# Altium PCB PC110.PcbDoc (part 9 of 24)
Units mm, origin at the board's own origin, x right, y up, seen from the top; angles counter-clockwise.
Board outline 150.05 x 107.35 mm, 10 copper layers (In2.Cu, F.Cu, B.Cu, In1.Cu, In3.Cu, In4.Cu, In5.Cu, In6.Cu, In7.Cu, In8.Cu); 936 components, 1434 nets, 4891 pads, 6088 vias.
Unrouted connection lines stored in the file: 2995.
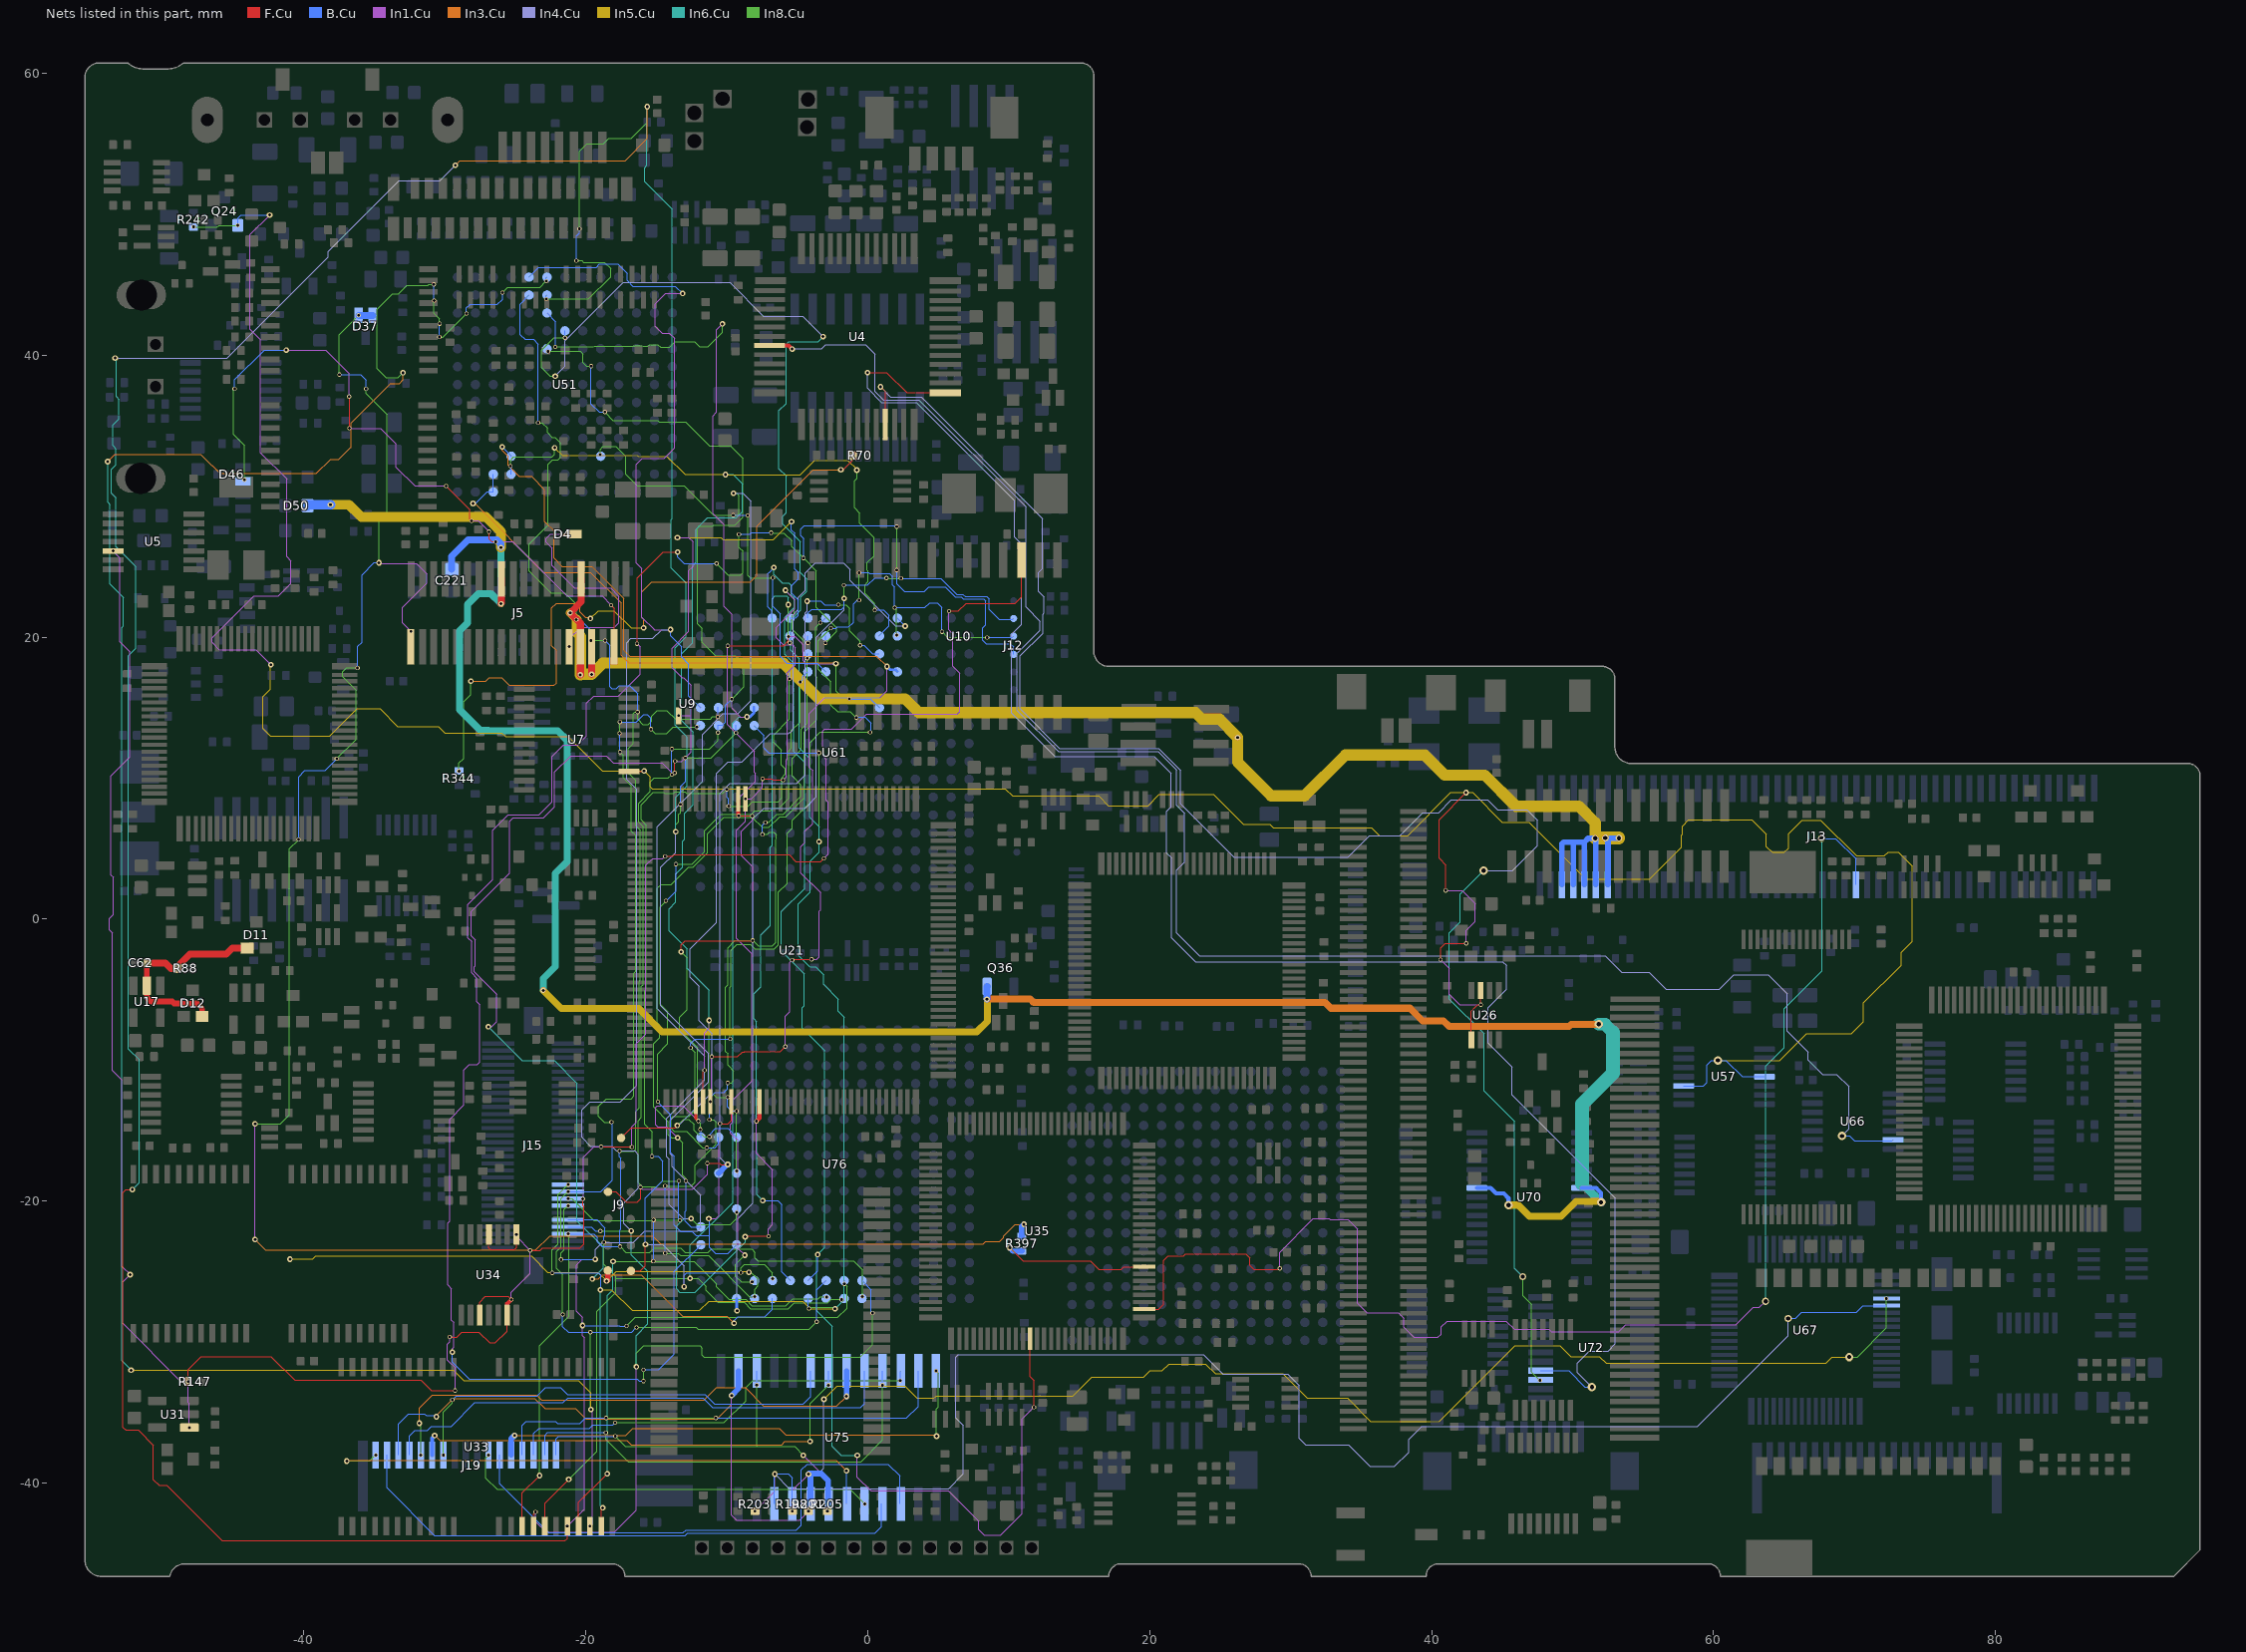
[diagram p16: the nets of this part, all layers, seen from the top]

## Via types
v1: diameter 0.3, hole 0.2, B.Cu to In8.Cu, tented both sides, 1934 vias
v2: diameter 0.4, hole 0.2, F.Cu to B.Cu, tented both sides, 1902 vias
v3: diameter 0.3, hole 0.2, F.Cu to In1.Cu, tented both sides, 1729 vias
v4: diameter 0.6, hole 0.3, F.Cu to B.Cu, tented both sides, 354 vias
v5: diameter 0.5, hole 0.3, F.Cu to B.Cu, tented both sides, 136 vias
v6: diameter 0.4, hole 0.2, B.Cu to In8.Cu, tented both sides, 12 vias
v7: diameter 0.3, hole 0.2, F.Cu to B.Cu, tented both sides, 6 vias
v8: diameter 0.6, hole 0.2, F.Cu to B.Cu, tented both sides, 4 vias
v9: diameter 0.5, hole 0.2, B.Cu to In8.Cu, tented both sides, 3 vias
v10: diameter 0.5, hole 0.2, F.Cu to B.Cu, tented both sides, 2 vias
v11: diameter 0.4, hole 0.3, F.Cu to B.Cu, tented both sides, 2 vias
v12: diameter 0.3, hole 0.2, F.Cu to In4.Cu, tented both sides, 2 vias
v13: diameter 0.6, hole 0.3, B.Cu to In8.Cu, tented both sides, 1 vias
v14: diameter 0.3, hole 0.2, F.Cu to In3.Cu, tented both sides, 1 vias

## Nets (pads, with @x,y where several pads share a name; then routed paths per layer and width w, separated by ;. In a path a pad name is that pad's centre, name@x,y a point inside that pad or via, vN(x,y) a via of type N, cw(c..) or ccw(c..) an arc to the next point about the centre after c; other vN are vias at no path point) (continued)
CPU_D25: J15.33 U33.36 U51.E2 U61.B6 U76.K16 | length 133.3
  F.Cu w0.08: U33.36@-24.505,-43.05 -24.505,-40.685 v2(-23.28,-39.46)
  In8.Cu w0.08: v1(-23.39,35.21) -23.11,35.21 -22.73,34.83 -22.73,34.52 -22.39,34.18 -22.19,34.18 -21.78,33.77 -21.78,32.77 -21.98,32.57 -22.36,32.57 -22.66,32.27 -22.66,27.95 -24.02,26.59 -24.02,24.68 -22.47,23.13 -21.48,23.13 -20.67,22.32 v1(-20.67,21.25) ; v2(-23.28,-39.46) -23.28,-30.26 -21.18,-28.16 -21.18,-22.39 v1(-21.25,-22.32) ; v1(-19.64,19.77) v1(-18.63,19.77) ; v1(-17.61,-16.45) -16.59,-16.45 -16.46,-16.32 -16.46,-13.64 -16.22,-13.4 -16.22,-4.43 -16.13,-4.34 -16.13,6.32 -16.44,6.63 -16.44,9.86 -16.97,10.39 -16.97,12.12 -16.64,12.45 -16.64,14.59 -16.54,14.69 v1(-16.32,14.69) -16.32,14.18 -15.95,13.81 -15.56,13.81 -15.32,14.05 -15.32,14.41 -14.92,14.81 -14.25,14.81 -13.64,14.2 -11.16,14.2 -11,14.36 v1(-10.64,14.36) ; v1(-17.56,-23.22) -17.15,-23.63 -15.46,-23.63 -15.15,-23.32 -13.28,-23.32 -12.95,-23.65 -11.34,-23.65 -11.09,-23.4 -8.23,-23.4 -8,-23.63 -8,-24.04 -7.81,-24.23 -1.02,-24.23 -0.38,-24.87 v1(-0.38,-26.77)
  B.Cu w0.08: U51.E2@-24.02,44.27 -24.67,43.62 -24.67,41.47 -24.32,41.12 -23.71,41.12 -23.39,40.8 v1(-23.39,35.21) ; v1(-21.25,-22.32) -19.42,-22.32 -19.17,-22.57 -19.17,-22.91 -18.86,-23.22 v1(-17.56,-23.22) -17.59,-23.19 -17.59,-22.07 -17.5,-21.98 -17.5,-16.96 -17.61,-16.85 v1(-17.61,-16.45) ; v1(-20.67,21.25) -20.41,21.25 -19.64,20.48 v1(-19.64,19.77) ; v1(-18.63,19.77) -18.29,19.43 -18.29,16.48 -18.16,16.35 -17.82,16.35 -17.62,16.55 -16.88,16.55 -16.32,15.99 v1(-16.32,14.69) ; v1(-10.64,14.36) -10.615,14.385 U61.B6@-10.615,15.03 ; U76.K16@-0.41,-26.9 -0.38,-26.87 v1(-0.38,-26.77)
CPU_D26: J15.34 U33.37 U51.E1 U61.A6 U76.K15 | length 160
  F.Cu w0.08: U33.37@-23.705,-43.05 -23.705,-42.185 v3(-23.56,-42.04)
  In1.Cu w0.08: v3(-23.56,-42.04) -23.56,-42.72 -22.8,-43.48 -17.96,-43.48 -16.41,-41.93 v2(-16.41,-31.74) ; v2(-13.99,20.54) -15.16,20.54 -15.16,20.56 -16.02,21.42 -16.02,24.87 -16.42,25.27 -16.42,32.26 -15.98,32.7 -14.45,32.7 -13.71,33.44 -13.71,41.19 -14.08,41.56 -14.57,41.56 -15.06,42.05 -15.06,43.64 -14.32,44.38 v2(-13.13,44.38)
  In4.Cu w0.08: v2(-16.77,-22.11) -17.31,-21.57 -17.31,-20.13 -16.27,-19.09 -16.27,-16.69 -16.54,-16.42 -17.83,-16.42 -18.15,-16.1 -19.67,-16.1 -20.29,-15.48 -20.29,-13.52 -19.72,-12.95 -17.54,-12.95 -16.4,-11.81 -16.4,9.2 -17.1,9.9 -17.1,19.61 -16.8,19.91 -15.24,19.91 -14.61,20.54 v2(-13.99,20.54)
  In6.Cu w0.08: v2(-16.77,-22.11) -16.77,-23.81 -15.59,-24.99 -15.59,-28.71 -16.41,-29.53 v2(-16.41,-31.74)
  In8.Cu w0.08: v1(-18.96,-22.12) -18.95,-22.11 v2(-16.77,-22.11) ; v2(-16.41,-31.74) -16.41,-30.77 -15.9,-30.26 -11.89,-30.26 -11.74,-30.41 -11.74,-30.91 -11.6,-31.05 -0.53,-31.05 0.34,-30.18 v1(0.34,-27.94)
  B.Cu w0.08: U51.E1@-24.02,45.54 -23.34,46.22 -19.26,46.22 -19.02,46.46 -17.71,46.46 -17.07,45.82 -17.07,45.3 -16.67,44.9 -13.65,44.9 v2(-13.13,44.38) ; J15.34@-21.25,-21.82 -19.61,-21.82 -19.31,-22.12 v1(-18.96,-22.12) ; v2(-13.99,20.54) -13.99,20.11 -13.21,19.33 -13.21,18.61 -12.69,18.09 -12.69,15.81 -12.49,15.61 -12.48,15.61 U61.A6@-11.87,15 ; U76.K15@-0.41,-25.63 0.25,-26.29 0.25,-27.85 v1(0.34,-27.94)
CPU_D27: J15.35 U33.38 U51.F3 U61.D6 U76.J16 | length 132.3
  F.Cu w0.08: U33.38@-22.905,-43.05 -22.905,-41.425 v2(-21.21,-39.73)
  In1.Cu w0.08: v2(-10.31,42.22) -10.71,41.82 -10.71,35.98 -10.99,35.7 -10.99,28.76 -10.2,27.97 -10.2,22.18 -9.64,21.62 -9.64,14.97 -9.02,14.35 v2(-8.57,14.35)
  In6.Cu w0.08: v2(-12.6,-25.47) -12.6,-23.12 -9.575,-20.095 -9.575,13.435 -9.58,13.44 -9.58,13.9 -9.13,14.35 v2(-8.57,14.35)
  In8.Cu w0.08: v1(-22.16,40.59) -19.46,40.59 -19.4,40.65 -16.62,40.65 -16.58,40.69 -15.99,40.69 -15.94,40.64 -15.6,40.64 -15.48,40.76 -14.89,40.76 -14.7,40.57 -14.05,40.57 -13.66,40.96 -12.29,40.96 -11.94,40.61 -11.33,40.61 -10.31,41.63 v2(-10.31,42.22) ; v2(-21.21,-39.73) -21.2,-39.73 -19.22,-37.75 -19.22,-27.82 -17.88,-26.48 -17.88,-25.47 ; v1(-18.719,-22.919) -18.719,-24.501 -17.88,-25.34 -17.88,-25.47 ; v1(-1.85,-26.97) -2.6,-26.97 -2.83,-27.2 -5.2,-27.2 -5.62,-27.62 -8.31,-27.62 -8.74,-27.19 -10.62,-27.19 -11.47,-26.34 -11.47,-26.05 -12.05,-25.47 v2(-12.6,-25.47) -17.88,-25.47
  B.Cu w0.08: U51.F3@-22.75,43 -22.14,42.39 -22.14,40.61 v1(-22.16,40.59) ; J15.35@-21.25,-21.32 -19.22,-21.32 -18.63,-21.91 -18.63,-22.42 -18.719,-22.509 v1(-18.719,-22.919) ; v1(-1.85,-26.97) -1.75,-26.97 U76.J16@-1.68,-26.9
  B.Cu w0.2: v2(-8.57,14.35) -8.36,14.35 -8.075,14.635 U61.D6@-8.075,15.03
CPU_D28: J15.37 U33.40 U51.F2 U61.C7 U76.J15 | length 339.1
  F.Cu w0.08: v2(-52.17,-19.17) -52.61,-19.17 -52.82,-19.38 -52.82,-36.03 -52.61,-36.24 -51.74,-36.24 -50.67,-37.31 -50.67,-39.75 -50.27,-40.15 -49.71,-40.15 -45.79,-44.07 -21.46,-44.07 -21.305,-43.915 v3(-21.305,-43.05)
  In1.Cu w0.08: v3(-21.305,-43.05) -21.3,-43.05 -20.1,-41.85 -20.1,-29.68 -20.23,-29.55 v2(-20.23,-28.82) -20.23,-28.22 -20.65,-27.8 -20.65,-24.51 -20.26,-24.12 v2(-19.33,-24.12)
  In3.Cu w0.08: v2(-29.25,53.48) -28.92,53.81 -17.21,53.81 -15.64,55.38 v2(-15.64,57.63)
  In4.Cu w0.08: v2(-53.38,39.8) -45.45,39.8 -38.275,46.975 -38.275,47.355 -33.24,52.39 -30.34,52.39 v2(-29.25,53.48) ; v2(-19.33,-24.12) -19.33,-23.5 -19.32,-23.49 -19.32,-23.42 -18.83,-22.93 -16.64,-22.93 -15.81,-22.1 -12.08,-22.1 -11.85,-21.87 -11.85,-19.57 -13.86,-17.56 -13.86,-16.79 -14.02,-16.63 -14.02,-14.27 -11.3,-11.55 -11.3,-9.52 -14.67,-6.15 -14.67,3.68 -13.62,4.73 v2(-13.62,6.2)
  In6.Cu w0.08: v2(-53.38,39.8) -53.31,39.73 -53.31,37.06 -53.125,36.875 -53.125,35.475 -53.55,35.05 -53.55,33.59 -53.325,33.365 -53.325,32.225 -53.65,31.9 -53.65,30.2 -53.33,29.88 -53.33,26.42 -51.92,25.01 -51.92,19.2 -52.43,18.69 -52.43,-9.21 -51.675,-9.965 -51.675,-18.675 v2(-52.17,-19.17) ; v2(-15.64,57.63) -15.66,57.61 -15.66,53.47 -15.82,53.31 -15.82,52.31 -13.89,50.38 -13.89,28.42 -13.96,28.35 -13.96,24.92 -12.87,23.83 -12.87,20.03 -13.65,19.25 -13.65,13.76 -12.82,12.93 -12.82,9.45 -13.62,8.65 v2(-13.62,6.2)
  In8.Cu w0.08: v1(-22.81,43.99) -19.81,43.99 -18.24,45.56 -18.24,46.15 -18.68,46.59 -20.15,46.59 -20.27,46.71 v1(-20.66,46.71) ; v1(-21.76,-24.14) -21.76,-23.68 -21.53,-23.45 -21.53,-20.6 v1(-21.25,-20.32) ; v1(-20.45,48.96) -20.45,54.47 -19.93,54.99 -18.76,54.99 -18.37,55.38 -16.76,55.38 -15.64,56.5 v2(-15.64,57.63) ; v1(-17.11,-28.86) -16.49,-28.24 -2.13,-28.24 -1.48,-27.59 -1.48,-27.55 -1.47,-27.54 -1.47,-26.05 v1(-1.65,-25.87) ; v2(-13.62,6.2) -13.62,6.69 -13.41,6.9 -13.41,7.44 -13.29,7.56 v1(-13.29,8.15) ; v1(-12.93,11.44) -11.125,11.44 v1(-9.345,13.22)
  B.Cu w0.08: v1(-22.81,43.99) -22.81,44.21 U51.F2@-22.75,44.27 ; v1(-21.76,-24.14) -19.35,-24.14 v2(-19.33,-24.12) ; v1(-20.66,46.71) -20.66,48.44 -20.45,48.65 v1(-20.45,48.96) ; v2(-20.23,-28.82) -17.63,-28.82 -17.57,-28.88 -17.13,-28.88 v1(-17.11,-28.86) ; v1(-13.29,8.15) -13.29,9.43 -12.93,9.79 v1(-12.93,11.44) ; v1(-9.345,13.22) U61.C7@-9.345,13.76 ; U76.J15@-1.68,-25.63 -1.65,-25.66 v1(-1.65,-25.87)
CPU_D29: J15.38 U33.41 U51.F5 U61.B7 U76.H16 | length 135.5
  F.Cu w0.08: U33.41@-20.505,-43.05 -20.505,-41.365 -18.48,-39.34 v2(-18.48,-39.33)
  In6.Cu w0.08: v2(-18.48,-39.33) -18.48,-26.68 -18.08,-26.28 -18.08,-24.29 v2(-18.06,-24.27)
  In8.Cu w0.08: v1(-22.68,40.27) -20.39,40.27 -20.2,40.08 -20.2,39.46 -19.97,39.23 v1(-19.62,39.23) ; v1(-21.25,-19.82) -20.98,-19.82 -19.43,-21.37 -15.23,-21.37 v1(-15.19,-21.33) -15.17,-21.35 v1(-13.32,-21.35) ; v1(-18.65,35.97) -18.07,35.39 -14.91,35.39 -14.78,35.26 -12.91,35.26 -11.23,33.58 -9.72,33.58 -8.84,32.7 -8.84,28.516 -9.416,27.94 -10.93,27.94 -11.01,27.86 -11.96,27.86 -12.07,27.75 -12.07,20.96 -11.75,20.64 -11.75,19.63 -10.81,18.69 -9.4,18.69 -8.77,18.06 -8.77,16.48 v1(-9.64,15.61) ; v2(-18.06,-24.27) -15.22,-24.27 v1(-15.21,-24.26) -12.33,-24.26 -10.74,-25.85 -10.74,-26.07 -9.84,-26.97 -8.65,-26.97 -8.2,-27.42 -5.81,-27.42 -5.32,-26.93 -3.52,-26.93 -3.39,-26.8 v1(-2.91,-26.8) ; v1(-13.9,10.25) -14.14,10.01 -15.15,10.01 -15.43,9.73 -15.43,9.06 -16.26,8.23 -16.26,6.87 -15.94,6.55 -15.94,-4.66 -16.05,-4.77 -16.05,-14.07 -16.28,-14.3 -16.28,-18.69 -16.01,-18.96 -14.97,-18.96 -14.59,-18.58 -13.41,-18.58 v1(-13.4,-18.57) ; v1(-13.89,12.07) -11.21,12.07 -10.615,12.665 v1(-10.615,13.24)
  B.Cu w0.08: U51.F5@-22.75,40.46 -22.68,40.39 v1(-22.68,40.27) ; v1(-19.62,39.23) -19.62,36.54 -19.05,35.97 v1(-18.65,35.97) ; v1(-15.21,-24.26) -15.19,-24.24 v1(-15.19,-21.33) ; v1(-13.9,10.25) -13.9,12.06 v1(-13.89,12.07) ; v1(-13.4,-18.57) -13.4,-21.27 v1(-13.32,-21.35) ; v1(-10.615,13.24) -10.615,13.76 -10.3,13.76 -10.08,13.98 -10.08,15.17 v1(-9.64,15.61) ; U76.H16@-2.95,-26.9 -2.91,-26.86 v1(-2.91,-26.8)
CPU_D30: J15.39 U33.42 U51.F1 U61.A7 U76.H15 | length 243.1
  In1.Cu w0.08: v3@-19.68,-43.05 -19.53,-42.9 -19.53,-34.89 v2(-19.64,-34.78)
  In3.Cu w0.08: v2(-53.91,32.46) -53.41,32.96 -47.31,32.96 -46.53,32.18 -46.49,32.18 -45.93,31.62 -39.11,31.62 -38.1,32.63 -37.51,32.63 -36.69,33.45 -36.66,33.45 -36.66,35.18 -33.84,38 -33.23,38 -32.97,38.26 v2(-32.97,38.76)
  In5.Cu w0.08: v2(-52.25,-31.99) -29.41,-31.99 -28.66,-32.74 -20.51,-32.74 -19.64,-33.61 v2(-19.64,-34.78)
  In6.Cu w0.08: v2(-53.91,32.46) -53.91,29.57 -53.74,29.4 -53.74,23.77 -52.8,22.83 -52.8,20.8 -52.79,20.79 -52.915,20.665 -52.915,-31.325 v2(-52.25,-31.99)
  In8.Cu w0.08: v2(-32.97,38.76) -33.32,38.41 -34.17,38.41 -34.8,39.04 -34.8,43.26 -33.71,44.35 -33.28,44.35 -32.67,44.96 -31.19,44.96 -31.12,45.03 v1(-30.78,45.03) ; v1(-30.76,43.88) -30.76,42.96 -30.37,42.57 v1(-30.37,42.24) ; v1(-30.38,41.29) -30.12,41.29 v1(-28.46,42.95) ; v1(-25.91,44.45) -25.55,44.81 -23.26,44.81 v1(-22.81,45.26) ; v1(-21.64,-28.03) -21.64,-25.21 -22.08,-24.77 -22.08,-23.56 -21.76,-23.24 -21.76,-19.83 v1(-21.25,-19.32) ; v1(-19.67,-29.29) -19.66,-29.3 -19.66,-34.76 v2(-19.64,-34.78) ; v1(-18.18,-14.4) -18.69,-14.4 -19.1,-13.99 -19.1,-13.28 -18.55,-12.73 -16.79,-12.73 -16.59,-12.53 -16.59,-3.83 -16.47,-3.71 -16.47,5.94 -16.78,6.25 -16.78,9.47 -17.33,10.02 -17.33,11.62 v1(-17.57,11.86) ; v1(-17.61,13.19) -17.59,13.21 v1(-17.59,13.99) ; v1(-16.41,-28.95) -16.4,-28.94 -12.17,-28.94 -12.03,-29.08 -4.15,-29.08 v1(-3.62,-28.55) ; v1(-15.38,13.48) -15.07,13.17 -14.26,13.17 -13.8,13.63 v1(-12.12,13.63)
  B.Cu w0.08: v1(-30.78,45.03) -30.76,45.01 v1(-30.76,43.88) ; v1(-30.38,41.29) -30.37,41.3 v1(-30.37,42.24) ; v1(-28.46,42.95) -28.46,43.36 -28.2,43.62 -26.27,43.62 -25.91,43.98 v1(-25.91,44.45) ; v1(-22.81,45.26) -22.81,45.48 U51.F1@-22.75,45.54 ; v1(-21.64,-28.03) -21.64,-28.89 -21.24,-29.29 v1(-19.67,-29.29) -16.75,-29.29 v1(-16.41,-28.95) ; v1(-21.25,-19.32) -18.93,-19.32 -18.12,-18.51 -18.12,-14.46 v1(-18.18,-14.4) ; v1(-17.61,13.19) -17.57,13.15 v1(-17.57,11.86) ; v1(-17.59,13.99) -16.435,13.99 -15.9,14.525 -15.625,14.525 -15.38,14.28 v1(-15.38,13.48) ; v1(-12.12,13.63) -12.015,13.63 U61.A7@-11.885,13.76 ; v1(-3.62,-28.55) -3.62,-26.3 U76.H15@-2.95,-25.63
  other v3: -19.705,-43.05
CPU_D31: J15.40 U33.43 U51.G4 U61.D7 U76.G16 | length 166.5
  F.Cu w0.08: U33.43@-18.905,-43.05 -18.905,-41.855 v2(-18.8,-41.75)
  In4.Cu w0.08: v2(-22.17,38.51) -21.47,39.21 -21.47,41.03 -17.35,45.15 -9.78,45.15 -7.39,42.76 -4.61,42.76 v2(-3.17,41.32)
  In5.Cu w0.08: v2(-18.96,-26.29) -18.17,-26.29 -16.71,-27.75 -11.92,-27.75 -11.26,-27.09 -4.61,-27.09 -4.07,-27.63 v2(-2.32,-27.63)
  In6.Cu w0.08: v2(-18.96,-26.29) -18.96,-41.59 v2(-18.8,-41.75) ; v2(-3.17,41.32) -3.52,40.97 -5.61,40.97 -5.79,40.79 -5.79,36.59 -6.31,36.07 -6.31,31.96 -5.79,31.44 -5.79,28.83 -6.02,28.6 -6.02,28.01 -4.79,26.78 -4.79,24.59 -4.33,24.13 -4.33,23.25 -4.74,22.84 -4.74,21.92 -5.45,21.21 -5.45,19.08 -4.86,18.49 -4.86,12.15 -4.11,11.4 -4.11,7.22 -3.45,6.56 v2(-3.45,5.5) -3.45,4.74 -4.08,4.11 -4.08,1.91 -4.92,1.07 -4.92,-2.58 -4.12,-3.38 -3.69,-3.38 -3.13,-3.94 -3.13,-4.63 -2.1,-5.66 -2.1,-6.53 -1.67,-6.96 -1.67,-26.98 v2(-2.32,-27.63)
  In8.Cu w0.08: v1(-22.38,-25.09) -22.38,-23.45 -21.98,-23.05 -21.98,-19.55 v1(-21.25,-18.82) ; v2(-22.17,38.51) -22.53,38.51 -23.13,39.11 -23.13,40.37 -22.26,41.24 v1(-21.48,41.24) ; v1(-4.17,-27.61) -4.1,-27.54 -2.32,-27.54 v2(-2.32,-27.63) ; v2(-3.45,5.5) v1(-3.45,11.79)
  B.Cu w0.08: v1(-22.38,-25.09) -19.09,-25.09 -18.92,-25.26 -18.92,-26.25 v2(-18.96,-26.29) ; v1(-21.48,41.24) U51.G4@-21.48,41.73 ; U61.D7@-8.06,13.73 -7.37,13.04 -7.37,12.14 -7.02,11.79 v1(-3.45,11.79) ; U76.G16@-4.22,-26.9 -4.22,-27.56 v1(-4.17,-27.61)
CPU_DC#: U21.41 U61.H1 U76.A12 | length 62.5
  F.Cu w0.2: U21.41@-12.19,-12.94 -12.19,-14.14 v3(-12.02,-14.31)
  In1.Cu w0.08: v2(-13.49,-15.51) -14.26,-14.74 -14.91,-14.74 -15.05,-14.6 -15.05,-13.36 -14.93,-13.24 -13.09,-13.24 v3(-12.02,-14.31)
  In8.Cu w0.08: v1(-12.9,-18.57) -12.9,-18.4 -13.13,-18.17 -13.13,-15.87 v2(-13.49,-15.51) -13.92,-15.51 -14.14,-15.29 -14.14,-14.36 -15.17,-13.33 -15.17,-8.81 -14.76,-8.4 -14.76,-7.5 -14.93,-7.33 -14.93,2.2 -14.66,2.47 -13.93,2.47 -12.71,3.69 -12.39,3.69 -11.37,4.71 -11.37,6.05 -10.18,7.24 -8.21,7.24 -7.48,6.51 -7,6.51 -6.24,7.27 -5.82,7.27 -4.49,8.6 -4.49,13.28 -3.61,14.16 -3.61,17.14 -3.7,17.23 -3.7,20.69 v1(-3.35,21.04)
  B.Cu w0.08: v1(-12.9,-18.57) -12.9,-20.66 -12.96,-20.72 -12.96,-21.4 -12.54,-21.82 U76.A12@-11.84,-21.82 ; v1(-3.35,21.04) -3.335,21.04 U61.H1@-2.995,21.38
CPU_EADS#: J12.4 U61.H2 U76.A13 | length 143.1
  F.Cu w0.08: v3(-16.36,19.54) -16.36,24.19 -14.51,26.04 v2(-13.49,26.04)
  In1.Cu w0.08: v2(-29.47,-30.71) -29.47,-30.46 -29.36,-30.35 -29.36,-28.6 -29.53,-28.43 -29.53,-26.21 -29.8,-25.94 -29.8,-21.55 -29.66,-21.41 -29.66,-14.2 -28.64,-13.18 -28.64,-10.71 -28.25,-10.32 -27.71,-10.32 -27.52,-10.13 -27.52,-6.07 -27.73,-5.86 -27.73,-4.18 -28.1,-3.81 -28.1,-1.59 -28.37,-1.32 -28.37,1.03 -26.59,2.81 -26.59,6.31 -25.5,7.4 -23.31,7.4 -22.39,8.32 -22.39,11.54 -21.58,12.35 -20.57,12.35 -19.94,12.98 -19.94,15.32 -19.44,15.82 -17.69,15.82 -16.14,17.37 -16.14,19.32 v3(-16.36,19.54)
  In8.Cu w0.08: v1(-15.9,-32.76) v1(-15.9,-31.96) ; v1(-10.73,25.23) -9.91,24.41 -9.03,24.41 -8.87,24.57 -8.87,26.1 -9.14,26.37 v1(-9.14,27.3) ; v1(-6.85,27.41) -6.84,27.4 -5.94,27.4 -5.38,26.84 -5.38,26.44 v1(-4.55,25.61) -3.64,24.7 -3.64,22.11 -2.19,20.66 -2.19,20.405 v1(-2.995,19.6) ; v1(2.06,24.77) v1(2.06,27.84)
  B.Cu w0.08: v2(-29.47,-30.71) -29.47,-31.4 -28.27,-32.6 -16.35,-32.6 -16.19,-32.76 v1(-15.9,-32.76) ; v1(-15.9,-31.96) -14.83,-31.96 -13.73,-30.86 -13.73,-24.98 U76.A13@-11.84,-23.09 ; v2(-13.49,26.04) -13.49,25.69 -13.03,25.23 v1(-10.73,25.23) ; v1(-9.14,27.3) -8.37,27.3 -8.26,27.41 v1(-6.85,27.41) ; v1(-4.55,25.61) -4.55,26.98 -4.76,27.19 -4.76,27.67 -4.51,27.92 1.98,27.92 v1(2.06,27.84) ; v1(-2.995,19.6) U61.H2@-2.995,20.11 ; v1(2.06,24.77) 2.06,23.78 2.6,23.24 4.01,23.24 4.34,23.57 5.5,23.57 6.22,22.85 6.64,22.85 6.78,22.71 8.23,22.71 8.38,22.56 8.38,20.88 8.15,20.65 8.15,19.79 8.39,19.55 10.11,19.55 10.35,19.31 J12.4@10.35,18.78
CPU_FLUSH#: J12.2 U61.G1 U76.C16 | length 74.8
  In4.Cu w0.08: v2(-9.27,-27.77) -9.27,-21.29 -8.13,-20.15 -8.13,7.13 -7.38,7.88 -4.45,7.88 -3.64,8.69 -3.64,19.98 -1.67,21.95 v2(-1.67,22.75)
  In8.Cu w0.08: v1(-1.69,23.69) -1.67,23.67 v2(-1.67,22.75) ; v1(1.33,24.2) 1.35,24.18 v1(2.36,24.18)
  B.Cu w0.08: v2@-9.3,-27.74 v2(-9.27,-27.77) ; U61.G1@-4.265,21.38 -4.26,21.385 -4.26,21.72 -3.99,21.99 -1.84,21.99 -1.67,22.16 v2(-1.67,22.75) ; v1(-1.69,23.69) -0.01,23.69 0.5,24.2 v1(1.33,24.2) ; v1(2.36,24.18) 5.17,24.18 6.31,23.04 6.75,23.04 6.9,22.89 8.43,22.89 8.61,22.71 8.61,21.99 9.33,21.27 10.29,21.27 J12.2@10.35,21.33
  B.Cu w0.2: v2@-9.3,-27.74 U76.C16@-9.3,-26.9
CPU_HLDA: J9.4 U61.L3 U76.B9 | length 65.2
  F.Cu w0.08: J9.4@-18.42,-19.34 -17.86,-19.34 -17.14,-20.06 -16.35,-20.06 -16.11,-19.82 v3(-16.11,-19.01) ; v3(-11.38,-17.31) -10.5,-17.31 -10.41,-17.4 v2(-9.93,-17.4)
  In1.Cu w0.08: v3(-16.11,-19.01) -15.99,-19.13 -12.43,-19.13 -11.38,-18.08 v3(-11.38,-17.31)
  In4.Cu w0.08: v2(-9.93,-17.4) -9.99,-17.4 -10.48,-16.91 -10.48,8.94 -9.77,9.65 -5.02,9.65 -4.42,10.25 -4.42,21.74 -4.3,21.86 v2(-4.3,22.56)
  In8.Cu w0.08: v1(-2.08,22.3) -1.54,22.3 -1.3,22.06 -1.3,20.45 -0.55,19.7 v1(-0.55,19.425)
  B.Cu w0.08: v2(-4.3,22.56) -3.32,22.56 -3.06,22.3 v1(-2.08,22.3) ; v1(-0.55,19.425) -0.255,19.425 0.33,18.84 U61.L3@0.815,18.84
  B.Cu w0.4: U76.B9@-10.57,-18.01 -9.96,-17.4 v2(-9.93,-17.4)
CPU_HOLD: J9.1 U61.M1 U76.C7 | length 66.3
  F.Cu w0.08: J9.1@-17.495,-15.515 -16.77,-14.79 -13.67,-14.79 v2(-13.51,-14.63)
  In4.Cu w0.08: v2(-13.51,-14.63) -13.4,-14.63 -11.05,-12.28 -11.05,-8.12 -11.96,-7.21 -11.96,-4.74 -12.59,-4.11 -12.59,-2.1 -10.73,-0.24 -10.73,10.33 -9.9,11.16 -8.92,11.16 -6.91,13.17 -5.62,13.17 -5.56,13.23 -5.51,13.23 -5.29,13.45 -5.29,21.6 -4.92,21.97 -4.92,22.83 -4.43,23.32 -4.43,24.56 -3.72,25.27 -1.72,25.27 -1.25,24.8 -1.25,24.02 1.98,20.79 v2(2.65,20.79)
  In8.Cu w0.08: v2(-13.51,-14.63) -13.06,-14.18 -12.69,-14.18 -12.32,-14.55 -12.32,-14.97 -12.03,-15.26 -11.8,-15.26 -11.62,-15.44 v1(-11.23,-15.44)
  B.Cu w0.08: v1(-11.23,-15.44) -11.23,-15.3 -10.78,-14.85 -9.92,-14.85 U76.C7@-9.3,-15.47 ; U61.M1@2.085,21.38 2.085,21.375 2.65,20.81 v2(2.65,20.79)
CPU_INTR: U21.133 U61.G2 U76.D15 | length 61.8
  F.Cu w0.08: v3(-7.46,9.96) -6.8,9.96 -6.72,9.88 -6.01,9.88 v3(-6,9.87)
  In1.Cu w0.08: v2(-8.72,-23.83) -9.2,-23.35 -9.2,-15.69 -9.72,-15.17 -9.72,-14.56 -9.58,-14.42 -9.58,-12.85 -8.21,-11.48 -8.21,-2.46 -9.32,-1.35 -9.32,6.3 -8.68,6.94 v3(-8.68,8.535) -8.265,8.535 -7.46,9.34 v3(-7.46,9.96) ; v3(-6,9.87) -5.79,10.08 -5.79,11.26 -5.7,11.35 -5.7,17.47 -5.13,18.04 -5.13,19.26 -5.33,19.46 -6,19.46 -6.48,19.94 -6.48,20.7 -5.16,22.02 -5.16,22.64 -5.84,23.32 v2(-5.84,23.33)
  In8.Cu w0.08: v2(-8.72,-23.83) -9.37,-24.48 -9.37,-25.32 -8.97,-25.72 v1(-8.21,-25.72) ; v2(-5.84,23.33) -5.22,22.71 -5.22,21.67 -5.37,21.52 -5.37,20.57 -4.4,19.6 v1(-4.25,19.6)
  B.Cu w0.08: v1(-8.21,-25.72) -8.12,-25.72 U76.D15@-8.03,-25.63 ; U61.G2@-4.265,20.11 -4.265,19.615 v1(-4.25,19.6)
CPU_KEN#: J12.3 U61.M2 U76.B7 | length 78.2
  In8.Cu w0.08: v1(-12.57,-9.13) -12.24,-9.46 -12.24,-13.56 -12.68,-14 -13.83,-14 -13.95,-14.12 -13.95,-14.85 -13.74,-15.06 -12.85,-15.06 -11.7,-16.21 v1(-11.41,-16.21) ; v1(-9.76,-8.49) -9.76,-4.81 -9.71,-4.76 -9.71,-2.2 -9.28,-1.77 -8.33,-1.77 -7.99,-2.11 -6.64,-2.11 -6.34,-1.81 -6.34,1.91 -5.72,2.53 -5.72,6.09 -5.35,6.46 -5.35,7.01 -4.07,8.29 -4.07,12.55 -3.36,13.26 v1(0.16,13.26) ; v1(-2.62,20.64) -3.5,19.76 -3.5,17.72 -2.62,16.84 -2.62,15.2 -2.15,14.73 -1.24,14.73 v1(-0.81,14.3) ; v1(-0.61,22.62) v1(-0.61,24.57) ; v1(1.91,22.1) 2.05,21.96 v1(2.05,20.16) ; v1(5.28,20.39) 5.66,20.01 8.44,20.01 v1(8.47,19.98)
  B.Cu w0.08: v1(-12.57,-9.13) -12.57,-8.83 -12.23,-8.49 v1(-9.76,-8.49) ; v1(-11.41,-16.21) -10.84,-16.21 -10.57,-15.94 U76.B7@-10.57,-15.47 ; v1(-2.62,20.64) -2.24,20.64 -2.16,20.72 -1.34,20.72 -1,21.06 -1,22.36 -0.74,22.62 v1(-0.61,22.62) ; v1(-0.81,14.3) -0.76,14.35 -0.2,14.35 0.24,13.91 0.24,13.34 v1(0.16,13.26) ; v1(-0.61,24.57) -0.59,24.59 0.05,24.59 0.11,24.53 1.53,24.53 1.77,24.29 1.77,23.69 1.91,23.55 v1(1.91,22.1) 4.05,22.1 4.4,22.45 4.94,22.45 5.26,22.13 5.26,20.41 v1(5.28,20.39) ; v1(8.47,19.98) 10.25,19.98 J12.3@10.35,20.08
CPU_LDEV#: U21.43 U51.D11 U61.M4 | length 84
  F.Cu w0.08: v3(-11.07,-9.75) -9.24,-9.75 -8.9,-9.41 -8.75,-9.41 -8.735,-9.395 -6.205,-9.395 v3(-5.85,-9.04) ; v3(-5.36,-2.9) -5.31,-2.85 v3(-3.98,-2.85)
  In1.Cu w0.08: v3(-11.174,-12.94) -11.07,-12.836 v3(-11.07,-9.75) ; v3(-5.85,-9.04) -5.85,-6.88 -5.53,-6.56 -5.53,-3.07 v3(-5.36,-2.9) ; v3(-3.98,-2.85) -3.61,-2.85 -3.43,-2.67 -3.43,0.57 -3.35,0.65 -3.35,1.89 -4.74,3.28 -4.74,5.13 -4.46,5.41 -4.46,6.23 -3.92,6.77 -3.92,10.54 -4.16,10.78 -4.16,14.59 -3.04,15.71 0.87,15.71 1.36,16.2 v2(1.36,17.93)
  In3.Cu w0.08: v2(-25.93,33.5) -25.93,33.24 -25.51,32.82 -25.51,32.2 -24.73,31.42 -23.86,31.42 -22.91,30.47 -22.91,28.19 -22.27,27.55 -22.27,25.6 -21.67,25 -19.58,25 -17.32,22.74 -17.32,19.09 -16.89,18.66 0.63,18.66 v2(1.36,17.93)
  B.Cu w0.08: v2(-25.93,33.5) -25.29,32.86 U51.D11@-25.29,32.84
  B.Cu w0.2: v2(1.36,17.93) 1.6,17.69 1.965,17.69 U61.M4@2.085,17.57
CPU_MIO#: U21.50 U51.J11 U61.H4 U76.C11 | length 119.3
  F.Cu w0.08: v2(-8.69,-22.52) -8.65,-22.48 v3(-7.04,-22.48)
  F.Cu w0.3: v3(-7.9,-14.33) -7.68,-14.11 U21.50@-7.68,-12.94
  In1.Cu w0.08: v3(-7.9,-14.33) -7.9,-16.61 -6.75,-17.76 -6.75,-21.67 -7.04,-21.96 v3(-7.04,-22.48)
  In4.Cu w0.08: v2(-12.53,-21.23) -13.1,-21.23 -14.09,-20.24 -14.09,-17.02 -14.27,-16.84 -14.27,-14.12 -11.56,-11.41 -11.56,-9.72 -14.94,-6.34 -14.94,6.57 -11.72,9.79 -11.72,13.11 -10.25,14.58 -9.19,14.58 -8.28,15.49 -8.28,29.65 -8.84,30.21 v2(-9.53,30.21)
  In6.Cu w0.08: v2(-12.53,-21.23) -13.04,-21.23 -13.56,-21.75 -13.56,-26.23 -13.34,-26.45 -12.23,-26.45 -8.69,-22.91 v2(-8.69,-22.52)
  In8.Cu w0.08: v1(-18.98,32.96) -18.98,33.33 -18.79,33.52 -17.87,33.52 -17.17,32.82 -17.17,31.56 -16.34,30.73 -13.02,30.73 -10.94,28.65 v1(-9.54,28.65) -9.28,28.65 -9.12,28.81 -9.12,30.05 -9.28,30.21 v2(-9.53,30.21) ; v2(-12.53,-21.23) -12.09,-21.67 -9.74,-21.67 -9.3,-21.23 v1(-9.3,-20.8) ; v1(-8.51,28.63) -8.5,28.62 -8.5,24.39 -8.32,24.21 v1(-6.73,24.21)
  B.Cu w0.08: v1(-18.98,32.96) -18.98,32.88 U51.J11@-18.94,32.84 ; v1(-9.54,28.65) -8.53,28.65 v1(-8.51,28.63) ; v1(-6.73,24.21) -6.73,22.19 -6.2,21.66 -6.2,18.64 -5.73,18.17 -3.595,18.17 U61.H4@-2.995,17.57
CPU_NMI: J9.10 U61.G3 U76.D16 | length 98.3
  F.Cu w0.4: v2(-18.52,-25.66) -18.445,-25.585 J9.10@-18.445,-24.915
  In5.Cu w0.08: v2(-40.98,-24.11) -39.37,-24.11 -39.16,-23.9 -23.86,-23.9 -22.71,-25.05 -19.13,-25.05 v2(-18.52,-25.66) -17.83,-24.97 -8.5,-24.97 v2(-8.43,-25.04)
  In8.Cu w0.08: v1(-14.37,-23.69) -13.44,-23.69 -13.27,-23.86 -11.3,-23.86 -8.39,-26.77 v1(-8.02,-26.77) -8.02,-26.24 -7.8,-26.02 -7.8,-25.51 -8.27,-25.04 v2(-8.43,-25.04) ; v1(-14.37,-18.92) -12.52,-18.92 -12.26,-18.66 -12.26,-17.46 -10.77,-15.97 -10.77,-14.39 -10.94,-14.22 v1(-11.23,-14.22) ; v1(-9.94,-11.61) -9.67,-11.61 -9.51,-11.45 -9.51,-10.77 -9.93,-10.35 -9.93,-9.54 -10.08,-9.39 -10.08,-4.81 -9.91,-4.64 -9.91,-2.02 -9.41,-1.52 -8.13,-1.52 -7.77,-1.88 -6.76,-1.88 -6.53,-1.65 -6.53,-1.59 ; v1(-7.47,6.02) -7.12,6.02 -6.97,6.17 -6.65,6.17 -6.47,5.99 -6.47,5.7 -6.53,5.64 -6.53,-1.59 ; v1(-7.26,6.86) -7.03,6.86 -6.44,7.45 -6,7.45 -4.74,8.71 -4.74,9.54 -5.35,10.15 -5.35,11.41 -4.72,12.04 -4.72,13.47 -4.29,13.9 v1(-4.29,18.51) ; -6.53,-1.63 -6.53,-1.59
  B.Cu w0.08: v1(-14.37,-23.69) v1(-14.37,-18.92) ; v1(-11.23,-14.22) -11.23,-12.67 -10.85,-12.29 -10.19,-12.29 -9.94,-12.04 v1(-9.94,-11.61) ; U76.D16@-8.03,-26.9 -8.02,-26.89 v1(-8.02,-26.77) ; v1(-7.47,6.02) -7.47,6.65 v1(-7.26,6.86) ; v1(-4.29,18.51) -4.29,18.815 U61.G3@-4.265,18.84
CPU_RDY#: U21.134 U51.C12 U51.C13 U61.L6 U76.A7 | length 95.8
  F.Cu w0.08: v2(-13.24,-2.32) -13.24,-1.83 -12.96,-1.55 -8.2,-1.55 v3(-8.16,-1.51) ; v3(-9.94,19.39) -5.97,19.39 -5.62,19.74 v3(-5.62,20.05) ; v3@-9.08,7.42 v3(-9.16,7.34) -9.14,7.32 v3(-8.19,7.32)
  F.Cu w0.3: U21.134@-9.18,8.535 -9.18,7.36 v3(-9.16,7.34)
  In1.Cu w0.08: v3(-9.94,19.39) -9.94,13.82 -8.03,11.91 -8.03,10.41 -7.96,10.34 -7.96,9.78 -9.16,8.58 v3(-9.16,7.34) ; v3(-8.19,7.32) -8.19,7.01 -8.95,6.25 -8.95,4.49 -8.16,3.7 v3(-8.16,-1.51) ; v3(-5.62,20.05) -5.17,20.05 -4.58,19.46 -4.58,18.32 -4.39,18.13 v2(-2.26,18.13)
  In3.Cu w0.08: v2(-28,29.49) -27.88,29.49 -22.99,24.6 -19.66,24.6 -17.49,22.43 -17.49,18.71 -16.96,18.18 -2.31,18.18 v2(-2.26,18.13)
  In8.Cu w0.08: v2(-13.24,-2.32) -12.81,-2.75 -12.81,-6.43 -13.33,-6.95 -13.33,-7.83 -12.06,-9.1 -12.06,-14.3 -11.87,-14.49 v1(-11.87,-14.91) ; v2(-2.26,18.13) -2.25,18.12 -2.25,16.16 -1.71,15.62 v1(-1.31,15.62)
  B.Cu w0.08: v2(-28,29.49) -27.81,29.49 -27,30.3 U51.C13@-26.56,30.3 U51.C12@-26.56,31.57 ; v1(-11.87,-14.91) -11.84,-14.94 U76.A7@-11.84,-15.47 ; v1(-1.31,15.62) 0.21,15.62 U61.L6@0.83,15
CPU_RESET: U21.46 U61.G4 U76.C13 | length 64.3
  F.Cu w0.08: v3(-10.48,-14.5) -9.91,-14.5 -9.68,-14.27 U21.46@-9.68,-12.94
  In1.Cu w0.08: v2(-11.28,-21.24) -10.75,-21.24 -10.54,-21.03 -10.54,-14.95 -10.48,-14.89 v3(-10.48,-14.5)
  In8.Cu w0.08: v1(-14.89,-12.95) -14.89,-9.55 -14.18,-8.84 -14.18,-6.57 -14.73,-6.02 -14.73,0.88 v1(-14.31,1.3) ; v1(-13.6,3.9) -12.475,3.9 -11.59,4.785 -11.59,6.26 -10.4,7.45 -8.26,7.45 -8.01,7.7 -6.9,7.7 -6.7,7.9 -6.28,7.9 -5.61,8.57 -5.61,11.94 -5.42,12.13 -5.42,13.37 -4.79,14 v1(-4.79,16.82)
  B.Cu w0.08: v1(-14.89,-12.95) -13.97,-13.87 -13.97,-16.57 -13.73,-16.81 -13.73,-21.69 -13.27,-22.15 -12.46,-22.15 -12.17,-22.44 -11.23,-22.44 -11.22,-22.43 ; v1(-14.31,1.3) -13.6,2.01 v1(-13.6,3.9) ; v2(-11.28,-21.24) -11.22,-21.3 -11.22,-22.43 ; U76.C13@-9.3,-23.09 -9.93,-23.72 -10.79,-23.72 -11.22,-23.29 -11.22,-22.43 ; v1(-4.79,16.82) -4.61,17 -4.61,17.225 U61.G4@-4.265,17.57
CPU_SMI#: U61.F2 U76.F15 | length 55.6
  In6.Cu w0.08: v2(-7.45,-19.96) -7.87,-19.54 -7.87,-15.27 -7.91,-15.23 -7.91,-7.25 -8.09,-7.07 -8.09,-5.29 -7.58,-4.78 -7.58,-1.12 -6.91,-0.45 -6.91,5.11 -6.78,5.24 -6.78,22.72 -6.59,22.91 -5.74,22.91 -5.63,22.8 v2(-5.63,22.31)
  In8.Cu w0.08: v2(-5.63,22.31) -5.63,19.695 v1(-5.535,19.6)
  B.Cu w0.08: v2(-7.45,-19.96) -6.37,-19.96 -6.09,-20.24 -6.09,-25.03 U76.F15@-5.49,-25.63 ; v1(-5.535,19.6) U61.F2@-5.535,20.11
CPU_SMIACT#: U9.1 U61.F1 U76.E16 | length 108.1
  F.Cu w0.08: v3(-13.7,10.37) -13.7,11.16 v3(-13.66,11.2)
  In1.Cu w0.08: v2(-26.91,-7.63) -26.66,-7.63 -26.31,-7.28 -26.31,-5.33 -27.92,-3.72 -27.92,-3.36 -27.85,-3.29 -27.85,-1.46 -28.11,-1.2 -28.11,0.55 -25.4,3.26 -25.4,6.95 -25.16,7.19 -23,7.19 -22.21,7.98 -22.21,10.43 -21.06,11.58 -18.55,11.58 -18.04,11.07 -14.59,11.07 -13.89,10.37 v3(-13.7,10.37) ; v3(-13.66,11.2) -13.19,11.2 -12.52,11.87 -12.52,14.46 ; v2(-13.5,27.07) -12.69,27.07 -12.39,26.77 -12.39,25.02 -12.69,24.72 -12.69,20.43 -13.89,19.23 -13.89,17.85 -13.16,17.12 -13.05,17.12 -12.52,16.59 -12.52,14.46 ; v3(-13.42,14.44) -12.54,14.44 -12.52,14.46
  In3.Cu w0.08: v2(-19.54,-25.52) -19.12,-25.52 -18.84,-25.24 -16.07,-25.24 -13.14,-28.17 -9.97,-28.17 v2(-9.48,-28.66)
  In5.Cu w0.08: v2(-13.5,27.07) -13.49,27.08 -10.42,27.08 -10.25,26.91 -6.7,26.91 v2(-5.41,28.2)
  In6.Cu w0.08: v2(-26.91,-7.63) -24.51,-10.03 -22.23,-10.03 -20.61,-11.65 -20.61,-21.4 -18.77,-23.24 -18.77,-24.75 v2(-19.54,-25.52)
  B.Cu w0.08: v2(-9.48,-28.66) -9.48,-28.47 -9.2,-28.19 -7.3,-28.19 -6.76,-27.65 U76.E16@-6.76,-26.9 ; U61.F1@-5.535,21.38 -5.12,21.38 -4.94,21.56 -4.94,22.64 -5.4,23.1 -5.4,23.67 -4.94,24.13 -4.94,24.6 -5.17,24.83 -5.17,27.37 -5.41,27.61 v2(-5.41,28.2)
CPU_SRESET: J9.9 U61.F4 U76.E15 | length 70.5
  F.Cu w0.08: J9.9@-16.795,-24.94 -16.12,-24.94 -15.77,-24.59 v2(-15.77,-23.06)
  In4.Cu w0.08: v2(-15.77,-23.06) -14.55,-23.06 -13.02,-24.59 v2(-13.02,-26.07)
  In8.Cu w0.08: v1(-15.3,-16.81) -15.3,-15.07 -15.82,-14.55 -15.82,-5.06 -15.7,-4.94 -15.7,6.68 -16.07,7.05 -16.07,8.12 -15.21,8.98 -14.48,8.98 -14.41,8.91 -13.77,8.91 -13.66,9.02 -13.01,9.02 ; -12.95,9.02 -13.01,9.02 ; v1(-10,9.21) -10.29,8.92 -12.84,8.92 -12.94,9.02 -13.01,9.02 ; v1(-9.87,8.02) -8.49,8.02 -8.17,8.34 -6.36,8.34 -6.1,8.6 -6.1,10.04 -5.85,10.29 -5.85,10.66 -6.14,10.95 -6.14,12.02 -6.66,12.54 -6.66,13.07 -5.55,14.18 v1(-5.55,17.05) ; v1(-8.99,-25.07) -8.99,-24.73 -8.75,-24.49 -7.35,-24.49 -6.75,-25.09 v1(-6.75,-25.5)
  B.Cu w0.08: v2(-15.77,-23.06) -15.77,-19.8 -14.53,-18.56 -14.53,-17.16 -14.88,-16.81 v1(-15.3,-16.81) ; v2(-13.02,-26.07) -13.02,-25.25 -12.84,-25.07 v1(-8.99,-25.07) ; v1(-10,9.21) -10,8.65 -9.87,8.52 v1(-9.87,8.02) ; U76.E15@-6.76,-25.63 -6.75,-25.62 v1(-6.75,-25.5) ; v1(-5.55,17.05) -5.535,17.065 U61.F4@-5.535,17.57
CPU_STPCLK#: U35.62 U61.E1 U76.G15 | length 103.6
  F.Cu w0.08: U35.62@11.51,-29.75 11.51,-32.45 11.79,-32.73 v3(11.79,-34.61)
  In1.Cu w0.08: v2(-0.74,-38.03) -0.74,-39.57 0.23,-40.54 5.71,-40.54 7.87,-42.7 7.87,-43.31 8.26,-43.7 9.41,-43.7 10.96,-42.15 10.96,-35.44 v3(11.79,-34.61)
  In6.Cu w0.08: v2(-6.66,24.94) -6.66,24.45 -6.05,23.84 -5.59,23.84 -5.41,23.66 -5.41,23.01 -5.21,22.81 -5.21,22.1 -5.89,21.42 -5.89,18.79 -5.24,18.14 -5.24,11.89 -4.48,11.13 -4.48,2.18 -6.12,0.54 -6.12,-2.25 -4.51,-3.86 -4.51,-6.12 -4.65,-6.26 -4.65,-7.71 -3.05,-9.31 -3.05,-23.29 v2(-3.55,-23.79) -3.61,-23.85 -3.61,-27.77 -2.525,-28.855 -2.525,-37.395 -1.89,-38.03 v2(-0.74,-38.03)
  B.Cu w0.08: U61.E1@-6.805,21.38 -6.805,21.875 -7.07,22.14 -7.07,24.52 -6.96,24.63 -6.96,24.64 v2(-6.66,24.94) ; U76.G15@-4.22,-25.63 -3.55,-24.96 v2(-3.55,-23.79)
CPU_WR#: U21.42 U51.D12 U61.L2 U76.C9 | length 104.6
  F.Cu w0.08: U21.42@-11.682,-12.94 -11.682,-10.812 v3(-11.58,-10.71)
  In1.Cu w0.08: v3(-11.58,-10.71) -11.58,-8.07 -11.25,-7.74 v2(-11.25,-7.18)
  In5.Cu w0.08: v2(-22.21,33.44) -21.66,32.89 -16.34,32.89 -16.27,32.82 -14.25,32.82 -12.97,31.54 v2(-10.09,31.54) -10.08,31.53 -4.79,31.53 -3.76,32.56 -1.42,32.56 -0.77,31.91 v2(-0.77,31.86)
  In6.Cu w0.08: v2(-11.25,-7.18) -11.25,-5.04 -12.82,-3.47 -12.82,-2.12 -14.1,-0.84 -14.1,0.74 -13.63,1.21 -13.63,3.19 -13.14,3.68 -13.14,5.54 -13.13,5.54 -12.99,5.68 -12.99,7.52 -12.38,8.13 -12.38,13.26 -13.21,14.09 -13.21,18.82 -12.44,19.59 -12.44,25.06 -12.18,25.32 -12.18,27.66 -11.36,28.48 -9.32,28.48 -8.89,28.91 -8.89,30.88 -9.55,31.54 v2(-10.09,31.54)
  In8.Cu w0.08: v1(-25.34,32.13) -25.34,32.56 -25.12,32.78 -22.41,32.78 -22.21,32.98 v2(-22.21,33.44) ; v2(-11.25,-7.18) -11.25,-12.1 -10.72,-12.63 v1(-9.94,-12.63) ; v1(-9.31,-13.61) -9.32,-13.62 -9.32,-17.83 v1(-9.3,-17.85) ; v2(-0.77,31.86) -0.77,31.28 -0.95,31.1 -0.95,29.17 -0.57,28.79 -0.57,28.08 0.43,27.08 0.43,25.76 -0.04,25.29 -0.04,24.78 0.02,24.72 0.02,23.94 -0.2,23.72 -0.2,23.09 0.49,22.4 v1(0.49,21.93)
  B.Cu w0.08: v1(-25.34,32.13) -25.29,32.08 U51.D12@-25.29,31.57 ; v1(-9.94,-12.63) -9.94,-13.31 -9.64,-13.61 v1(-9.31,-13.61) ; v1(0.49,21.93) 1.11,21.93 1.5,21.54 1.5,20.795 U61.L2@0.815,20.11
D4_3: D4.3 J5.35 | length 16.3
  F.Cu w0.08: v3(-21.68,27.32) -20.85,27.32 D4.3@-20.84,27.31
  In1.Cu w0.08: v3(-21.68,27.32) -22.49,27.32 -22.81,27 -22.81,26.73 -22.41,26.33 -22.41,25.09 -20.8,23.48 -18.22,23.48 -17.64,22.9 -17.64,21.03 -17.96,20.71 -20.34,20.71 -21.18,19.87 v3(-21.18,19.33)
D11_2: C62.2 D11.3 D12.1 R88.1 U17.2 | length 15.2
  F.Cu w0.4: C62.2@-51.1,-3.11 -51.13,-3.14 U17.2@-51.13,-4.713 -51.13,-5.55 -50.85,-5.83 -49.34,-5.83 -49.19,-5.98 -47.56,-5.98 -47.205,-6.335 D12.1@-47.205,-6.895
  F.Cu w0.5: C62.2@-51.1,-3.11 -49.81,-3.11 -49.43,-3.49 R88.1@-48.9,-3.49 -48.9,-3.3 -48.08,-2.48 -45.5,-2.48 -45.075,-2.055 D11.3@-44.01,-2.055
D18_2_3: D37.1 D37.2 J5.21 R397.2 | length 143.5
  F.Cu w0.08: J5.21@-32.43,19.33 -32.4,19.36 v3(-32.4,20.42)
  In1.Cu w0.08: v2(-43.46,-22.72) v2(-43.46,-14.52) ; v2(-34.67,25.28) -34.61,25.22 -32.01,25.22 -31.27,24.48 -31.27,23.83 -32.99,22.11 -32.99,21.01 v3(-32.4,20.42)
  In3.Cu w0.08: v2(-43.46,-22.72) -42.71,-23.47 -23.56,-23.47 -22.55,-22.46 -15.27,-22.46 -14.7,-23.03 8.2,-23.03 8.37,-22.86 9.34,-22.86 9.63,-22.57 9.63,-22.47 10.46,-21.64 v2(11.08,-21.64)
  In8.Cu w0.08: v2(-43.46,-14.52) -41.67,-14.52 -41.03,-13.88 -41.03,4.99 v1(-40.37,5.65) ; v1(-37.66,11.39) -36.29,12.76 -36.29,16.26 -37.24,17.21 -37.24,17.545 -36.965,17.82 v1(-36.19,17.82) ; v1(-37.48,38.62) -37.48,41.46 v1(-36.11,42.83) ; v1(-35.58,37.61) -35.58,37.28 -34.08,35.78 -34.08,28.82 -34.67,28.23 v2(-34.67,25.28)
  B.Cu w0.08: v1(-40.37,5.65) -40.37,10.1 -39.92,10.55 -38.49,10.55 -37.66,11.38 v1(-37.66,11.39) ; v1(-37.48,38.62) -35.96,38.62 -35.58,38.24 v1(-35.58,37.61) ; v1(-36.19,17.82) -36.19,19.34 -35.88,19.65 -35.88,24.42 -35.02,25.28 v2(-34.67,25.28)
  B.Cu w0.4: R397.2@10.93,-22.5 10.93,-21.79 v2(11.08,-21.64)
  B.Cu w0.5: v1(-36.11,42.83) D37.1@-35.11,42.83
D28_1: C221.2 D50.1 J5.12 Q36.2 U70.7 U70.24 | length 171.5
  F.Cu w0.5: v2(-26.01,22.37) -25.98,22.4 J5.12@-25.98,24.13
  In3.Cu w0.5: v2(8.45,-5.67) 11.54,-5.67 11.79,-5.92 32.47,-5.92 32.86,-6.31 38.46,-6.31 39.36,-7.21 40.85,-7.21 41.23,-7.59 49.76,-7.59 49.9,-7.45 v4(51.86,-7.45)
  In5.Cu w0.08: 51.95,-20.01 v4(52.02,-20.08)
  In5.Cu w0.5: v2(-23.02,-5.05) -21.73,-6.34 -16.24,-6.34 -14.59,-7.99 7.73,-7.99 8.48,-7.24 8.48,-5.7 v2(8.45,-5.67) ; v4(45.45,-20.28) 46.14,-20.28 46.94,-21.08 49.18,-21.08 50.25,-20.01 51.95,-20.01
  In5.Cu w0.7: v2(-38.11,29.4) -36.79,29.4 -35.93,28.54 -27.07,28.54 -26.02,27.49 v2(-26.02,26.36)
  In6.Cu w0.5: v2(-26.02,26.36) -26.02,22.38 v2(-26.01,22.37) -26.74,23.1 -27.62,23.1 -28.4,22.32 -28.4,21.01 -28.94,20.47 -28.94,14.84 -27.48,13.38 -26.92,13.38 -26.9,13.36 -21.98,13.36 -21.33,12.71 -21.33,4.07 -22.16,3.24 -22.16,-3.35 -23.02,-4.21 v2(-23.02,-5.05)
  In6.Cu w0.6: 50.67,-18.73 51.56,-19.62 v4(52.02,-20.08)
  In6.Cu w0.9: v4(51.86,-7.45) 52.29,-7.45 52.86,-8.02
  In6.Cu w1: 50.67,-18.73 50.67,-13.12 52.86,-10.93 52.86,-8.02
  B.Cu w0.3: U70.24@43.22,-19.06 44.18,-19.06 44.57,-19.45 45.11,-19.45 45.45,-19.79 v4(45.45,-20.28) ; U70.7@50.645,-19.06 51.67,-19.06 52.02,-19.41 v4(52.02,-20.08)
  B.Cu w0.5: C221.2@-29.51,24.815 -29.51,25.75 -28.35,26.91 -26.3,26.91 -26.02,26.63 v2(-26.02,26.36) ; v2(8.45,-5.67) 8.45,-4.78 Q36.2@8.47,-4.76
  B.Cu w0.7: D50.1@-39.733,29.34 -39.672,29.4 v2(-38.11,29.4)
D46_1: D46.1 J5.39 | length 49.5
  F.Cu w0.08: v3(-36.78,37.07) -36.76,37.05 v3(-36.76,34.82) ; v3(-29.91,30.73) -28.24,29.06 -28.24,28.38 v3(-28.11,28.25) ; v3(-26.86,27.48) -26.86,26.95 -26.68,26.77 v3(-26.39,26.77) ; v3(-18.21,22.28) -17.98,22.05 J5.39@-17.98,19.33
  In1.Cu w0.08: v2(-41.25,40.37) -38.46,40.37 -36.78,38.69 v3(-36.78,37.07) ; v3(-36.76,34.82) -34.56,34.82 -33.46,33.72 -33.46,32.06 -32.13,30.73 v3(-29.91,30.73) ; v3(-28.11,28.25) -27.62,28.25 -26.86,27.49 v3(-26.86,27.48) ; v3(-26.39,26.77) -25.18,26.77 -21.32,22.91 -18.84,22.91 v3(-18.21,22.28)
  In8.Cu w0.08: v1(-44.91,37.61) -44.99,37.53 -44.99,34.37 -44.21,33.59 v1(-44.21,31.17)
  B.Cu w0.08: v1(-44.91,37.61) -44.91,38.26 -42.8,40.37 v2(-41.25,40.37)
D171_GPCLK: R198.1 U67.20 U75.22 U75.23 | length 99.3
  In1.Cu w0.08: v3(-5.35,-41.99) -5.35,-40.51 v2(-4.2,-39.36)
  In4.Cu w0.08: v2(-4.2,-39.36) -3.53,-39.36 -3.11,-38.94 v2(-3.11,-34.05)
  In5.Cu w0.08: v2(-3.11,-34.05) -2.17,-33.11 2.64,-33.11 3.5,-33.97 4.7,-33.97 4.86,-33.81 12.16,-33.81 12.18,-33.79 12.2,-33.81 14.56,-33.81 15.89,-32.48 19.59,-32.48 20.04,-32.03 20.89,-32.03 21.37,-31.55 23.96,-31.55 24.65,-32.24 29.45,-32.24 31.17,-33.96 34.02,-33.96 35.665,-35.605 40.555,-35.605 45.92,-30.24 49.09,-30.24 49.88,-31.03 51.9,-31.03 52.37,-31.5 67.96,-31.5 68.41,-31.05 v4(69.62,-31.05)
  In8.Cu w0.08: v4(69.62,-31.05) 70.19,-31.05 72.26,-28.98 v1(72.26,-26.91)
  B.Cu w0.4: U75.23@-4.06,-41.465 -4.06,-39.5 v2(-4.2,-39.36) -4.16,-39.32 -3.3,-39.32 -2.81,-39.81 U75.22@-2.81,-41.44
D171_GPDATA: R203.1 U67.21 U75.24 U75.25 | length 108.8
  In1.Cu w0.08: v3(-8,-41.99) -6.59,-40.58 v2(-6.59,-39.35)
  In4.Cu w0.08: v2(-6.59,-39.35) -5.55,-40.39 5.74,-40.39 6.78,-39.35 6.78,-35.91 6.24,-35.37 6.24,-31.05 6.42,-30.87 15.23,-30.87 15.25,-30.89 23.81,-30.89 25.18,-32.26 29.78,-32.26 30.59,-33.07 30.59,-36.81 31.08,-37.3 34.11,-37.3 35.63,-38.82 37.37,-38.82 38.39,-37.8 38.39,-36.91 39.31,-35.99 58.84,-35.99 65.29,-29.54 v5(65.29,-28.32)
  B.Cu w0.08: U75.25@-6.61,-41.44 -6.61,-39.37 v2(-6.59,-39.35) -5.62,-39.35 -5.36,-39.61 U75.24@-5.36,-41.44 ; v5(65.29,-28.32) 65.81,-28.32 66.24,-27.89 70.13,-27.89 70.61,-27.41 U67.21@72.26,-27.41
D171_P0A0: J19.6 U75.13 | length 36.6
  In3.Cu w0.08: v2(-25.05,-36.61) -17.17,-36.61 -16.68,-36.12 -6.26,-36.12 -5.8,-36.58 4.8,-36.58 v2(4.88,-36.66)
  In8.Cu w0.08: v1(4.84,-32.04) 5.01,-32.21 5.01,-34.61 4.88,-34.74 v2(4.88,-36.66)
  B.Cu w0.4: J19.6@-25.3,-38 -25.3,-36.86 v2(-25.05,-36.61)
D171_P0A1: J19.5 U75.12 | length 33.4
  In8.Cu w0.08: v1(-18.55,-35.37) -18.54,-35.38 v1(-10.77,-35.38)
  B.Cu w0.08: J19.5@-24.5,-38 -24.52,-37.98 -24.52,-35.91 -24.24,-35.63 -22.13,-35.63 -22,-35.76 -20.4,-35.76 -20.01,-35.37 v1(-18.55,-35.37) ; v1(-10.77,-35.38) 2.76,-35.38 3.59,-34.55 U75.12@3.59,-32.04
D171_P0A2: J19.4 U75.11 | length 30.3
  In8.Cu w0.08: v1(-17.92,-35.71) -10.19,-35.71 -8.65,-34.17 -8.65,-33.23 -8.13,-32.71 2.3,-32.71 v1(2.31,-32.72)
  B.Cu w0.08: J19.4@-23.7,-38 -23.7,-36.48 -23.33,-36.11 -19.73,-36.11 -19.5,-35.88 -18.09,-35.88 v1(-17.92,-35.71) ; v1(2.31,-32.72) 2.31,-32.07 U75.11@2.34,-32.04
D171_P0A3: J19.3 U75.10 | length 32.1
  In8.Cu w0.08: v1(-18.57,-36.41) -18.57,-36.88 -16.97,-38.48 -0.48,-38.48 1.06,-36.94 1.06,-33.06 v1(1.05,-33.05)
  B.Cu w0.08: J19.3@-22.9,-38 -22.9,-36.6 -22.71,-36.41 v1(-18.57,-36.41) ; U75.10@1.04,-32.04 1.05,-32.05 v1(1.05,-33.05)
D171_P0B0: J19.15 U75.9 | length 37.5
  B.Cu w0.08: J19.15@-32.5,-38 -32.5,-36.65 -32.11,-36.26 -31.24,-36.26 -30.94,-35.96 -29.55,-35.96 -27.88,-34.29 -21.61,-34.29 -21.28,-33.96 -11.69,-33.96 -11.01,-34.64 -0.51,-34.64 -0.21,-34.34 U75.9@-0.21,-32.04
D171_P0B1: J19.14 U75.8 | length 37.2
  In3.Cu w0.08: v2(-31.81,-35.75) -31.81,-34.68 -30.87,-33.74 -23.49,-33.74 -23.12,-34.11 -11.6,-34.11 -10.72,-33.23 -8.68,-33.23 -7.39,-34.52 -2.19,-34.52 v2(-1.51,-33.84)
  In8.Cu w0.08: v2(-31.81,-35.75) -31.7,-35.86 v1(-31.7,-38)
  B.Cu w0.4: v2(-1.51,-33.84) U75.8@-1.51,-32.04
D171_P0B2: J19.13 U75.7 | length 34
  In3.Cu w0.08: v2(-30.72,-36.62) -30.36,-36.98 -17.08,-36.98 -16.79,-37.27 -6.1,-37.27 -5.87,-37.04 v2(-4.09,-37.04)
  In8.Cu w0.08: v2(-4.09,-37.04) -4.09,-34.36 v1(-2.78,-33.05)
  B.Cu w0.08: v1(-2.78,-33.05) -2.78,-32.06 U75.7@-2.76,-32.04
  B.Cu w0.3: J19.13@-30.9,-38 -30.9,-36.8 v2(-30.72,-36.62)
D171_P0B3: J19.12 U75.6 | length 32.5
  In8.Cu w0.08: v1(-30.1,-38) -30.1,-34.96 -29.46,-34.32 v1(-29.46,-34.08)
  B.Cu w0.08: v1(-29.46,-34.08) -29.19,-33.81 -23.47,-33.81 -22.87,-33.21 -21.81,-33.21 -21.31,-33.71 -11.53,-33.71 -10.86,-34.38 -4.57,-34.38 -4.06,-33.87 U75.6@-4.06,-32.04
D171_P0C2: J19.2 R205.1 U75.3 | length 29.3
  In1.Cu w0.08: v2(-4.57,-38.03) -4.57,-38.04 -2.87,-39.74 v3(-2.87,-41.99)
  In8.Cu w0.08: v1(-17.9,-36.67) -17.18,-37.39 -7.85,-37.39 ; v1(-7.87,-33.04) -7.87,-37.37 -7.85,-37.39 ; v2(-4.57,-38.03) -4.57,-38.01 -5.19,-37.39 -7.85,-37.39
  B.Cu w0.08: J19.2@-22.1,-38 -22.1,-36.87 -21.92,-36.69 -17.92,-36.69 v1(-17.9,-36.67) ; v1(-7.87,-33.04) -7.87,-32.05 U75.3@-7.86,-32.04
D171_P0C3: J19.16 R201.1 U75.2 | length 44.8
  In1.Cu w0.08: v2(-9.66,-33.78) -9.66,-42.28 -9.33,-42.61 -4.82,-42.61 v3(-4.2,-41.99)
  In3.Cu w0.08: v2(-30.6,-35.29) -30.6,-35.2 -29.39,-33.99 -23.62,-33.99 -22.9,-34.71 -20.72,-34.71 -19.98,-35.45 -10.7,-35.45 -9.66,-34.41 v2(-9.66,-33.78)
  B.Cu w0.08: J19.16@-33.3,-38 -33.3,-35.8 -32.58,-35.08 -31.43,-35.08 -31.3,-35.21 -30.68,-35.21 v2(-30.6,-35.29)
  B.Cu w0.4: v2(-9.66,-33.78) -9.16,-33.28 U75.2@-9.16,-32.04
D171_P1A0: J19.18 U75.21 | length 40.3
  In3.Cu w0.08: v2(-36.95,-38.43) -36.91,-38.39 -2.24,-38.39 v2(-1.51,-39.12)
  In8.Cu w0.08: v2(-36.95,-38.43) -35.33,-38.43 v1(-34.9,-38)
  B.Cu w0.08: U75.21@-1.51,-41.44 v2(-1.51,-39.12)
D171_P1A1: J19.8 U75.20 | length 29.4
  In8.Cu w0.08: v1(-26.9,-38) -27.1,-38.2 -27.1,-39.64 -26.3,-40.44 -1.235,-40.44 v1(-0.21,-41.465)
D171_P1A2: J19.17 U75.19 | length 40.7
  B.Cu w0.08: J19.17@-34.1,-38 -34.1,-40.34 -30.73,-43.71 -12.95,-43.71 -12.78,-43.54 0.53,-43.54 0.99,-43.08 U75.19@0.99,-41.44
D171_P1A3: J19.7 U75.18 | length 38.5
  B.Cu w0.08: J19.7@-26.1,-38 -26.1,-40.05 -22.64,-43.51 -13.08,-43.51 -12.89,-43.32 -5.06,-43.32 -4.7,-42.96 -4.7,-39.05 -4.3,-38.65 1.45,-38.65 2.29,-39.49 U75.18@2.29,-41.44
Dock_PWR_IN-: J5.5 J5.36 J5.37 J13.53 J13.54 J13.55 J13.56 J13.57 | length 116.5
  F.Cu w0.08: v2(-20.39,17.33) v2@-20.38,17.34
  F.Cu w0.5: J5.36@-20.39,19.32 J5.36@-20.38,19.33 ; v2@-20.38,17.34 J5.36@-20.38,19.33 ; J5.5@-20.33,24.13 -20.32,24.12 -20.32,22.51 v2(-21.11,21.72) -20.38,20.99 J5.36@-20.38,19.33 ; v2(-19.58,17.37) J5.37@-19.58,19.33
  In5.Cu w0.4: v5(51.6,5.74) 51.63,5.77
  In5.Cu w0.5: v2(-20.39,17.33) -20.35,17.37
  In5.Cu w0.6: v2(-21.11,21.72) -20.65,21.26 ; -20.65,20.3 -20.39,20.04
  In5.Cu w0.7: -20.65,20.3 -20.65,21.26
  In5.Cu w0.8: v2(-20.39,17.33) -20.39,20.04 ; -20.35,17.37 v2(-19.58,17.37) -18.78,18.17 -6,18.17 -3.46,15.63 2.65,15.63 3.62,14.66 23.24,14.66 23.7,14.2 24.96,14.2 24.93,14.2 v2(26.24,12.89) 26.24,11.13 28.61,8.76 30.99,8.76 33.87,11.64 39.51,11.64 40.93,10.22 43.77,10.22 45.98,8.01 50.45,8.01 51.6,6.86 v5(51.6,5.74) ; 53.26,5.77 v5(53.28,5.75)
  In5.Cu w0.9: 51.63,5.77 v5(52.32,5.77) 53.26,5.77
  B.Cu w0.4: J13.53@49.24,2.45 49.24,5.35 49.36,5.47 50.1,5.47 ; J13.54@50.04,2.45 50.04,5.41 50.1,5.47 ; J13.55@50.84,2.45 50.84,5.47 ; J13.56@51.64,2.45 51.64,5.7 v5(51.6,5.74) 51.11,5.74 50.84,5.47 ; v5(52.32,5.77) 52.51,5.58 ; J13.57@52.49,2.45 52.51,2.47 52.51,5.16 52.51,5.58 ; v5(53.28,5.75) 52.68,5.75 52.51,5.58 ; 50.1,5.47 50.84,5.47
EN_LCD_VAA: R397.1 U35.83 | length 11.2
  F.Cu w0.08: v2(10.07,-23.3) 11,-24.23 15.78,-24.23 16.39,-24.84 17.97,-24.84 18.16,-24.65 U35.83@19.61,-24.65
  B.Cu w0.4: v2(10.07,-23.3) 10.29,-23.52 R397.1@10.93,-23.52
EN_RS232: J13.79 U35.77 | length 98.7
  F.Cu w0.08: U35.77@19.61,-27.65 20.65,-27.65 20.99,-27.31 20.99,-24.22 21.31,-23.9 22.39,-23.9 22.56,-23.73 26.83,-23.73 27.12,-24.02 27.12,-24.57 27.38,-24.83 29.16,-24.83 v3(29.22,-24.77)
  In1.Cu w0.08: v3(29.22,-24.77) 29.22,-23.64 31.61,-21.25 32.73,-21.25 32.8,-21.32 34.07,-21.32 34.73,-21.98 34.73,-27.26 35.4,-27.93 37.63,-27.93 38.02,-28.32 38.02,-28.95 38.73,-29.66 40.45,-29.66 40.69,-29.42 40.69,-28.91 41.1,-28.5 45.29,-28.5 45.87,-29.08 48.31,-29.08 48.5,-29.27 53.28,-29.27 53.77,-28.78 61.56,-28.78 62.8,-27.54 63.25,-27.54 v5(63.69,-27.1)
  In6.Cu w0.08: v5(63.69,-27.1) 63.69,-10.42 65.01,-9.1 65.01,-6.35 67.69,-3.67 67.69,5.69 v5(67.66,5.72)
  B.Cu w0.08: v5(67.66,5.72) 68.66,5.72 70.09,4.29 J13.79@70.09,2.45
Enable_IRDA_Buf: Q24.1 R242.2 U7.15 U26.1 U26.7 U57.4 U57.10 | length 243
  F.Cu w0.08: U7.15@-16.937,10.475 -15.905,10.475 v2(-15.86,10.52) ; v3(40.63,-2.87) 40.63,-2.05 40.97,-1.71 v3(42.45,-1.71) ; v3(41,2.04) 41,3.85 40.53,4.32 40.53,7.07 v2(42.44,8.98) ; U26.1@42.82,-8.55 42.82,-6.52 43.27,-6.07 v3(43.49,-6.07) 43.49,-5.07 U26.7@43.47,-5.05
  In1.Cu w0.08: v2(-42.42,49.95) -43.82,48.55 -43.82,41.85 -43.08,41.11 -43.08,33.08 -41.22,31.22 -41.22,25.71 -40.93,25.42 -40.93,23.8 -41.79,22.94 -43.55,22.94 -46.52,19.97 -46.52,19.63 -46,19.11 -43.4,19.11 v2(-42.34,18.05) ; v3(40.63,-2.87) 41.25,-3.49 41.25,-5.33 41.99,-6.07 v3(43.49,-6.07) ; v3(41,2.04) 42.17,2.04 43.08,1.13 43.08,-0.16 42.45,-0.79 v3(42.45,-1.71)
  In5.Cu w0.08: v2(-42.34,18.05) -42.37,18.02 -42.37,16.3 -42.9,15.77 -42.9,13.51 -42.38,12.99 -38.16,12.99 -36.23,14.92 -34.61,14.92 -33.34,13.65 -30.44,13.65 -30,13.21 -25.97,13.21 -25.7,12.94 -21.26,12.94 -18.84,10.52 v2(-15.86,10.52) -15.43,10.09 -15.43,9.39 -15.29,9.25 9.76,9.25 10.26,8.75 16.38,8.75 17.08,8.05 19.89,8.05 20.68,8.84 24.53,8.84 26.64,6.73 28.53,6.73 28.77,6.49 35.72,6.49 36.28,5.93 38.31,5.93 41.36,8.98 v2(42.44,8.98) 42.91,8.98 45.01,6.88 46.89,6.88 50.92,2.85 55.45,2.85 57.715,5.115 57.715,5.945 57.79,6.02 57.79,6.61 58.22,7.04 62.71,7.04 63.74,6.01 63.74,5.15 64.14,4.75 65.01,4.75 65.31,5.05 65.31,6.07 66.27,7.03 67.58,7.03 70.12,4.49 72.13,4.49 72.38,4.74 73.11,4.74 74.08,3.77 74.08,-1.56 73.3,-2.34 73.3,-3.26 70.64,-5.92 70.64,-7.27 69.78,-8.13 66.58,-8.13 64.7,-10.01 v4(60.3,-10.01)
  In8.Cu w0.08: v1(-47.82,49.1) -46.14,49.1 -46.03,49.21 v1(-44.68,49.21)
  B.Cu w0.08: v1(-44.68,49.21) -44.68,49.73 -44.46,49.95 v2(-42.42,49.95) ; U57.10@57.877,-11.82 59.28,-11.82 59.53,-11.57 59.53,-10.33 59.85,-10.01 v4(60.3,-10.01) 60.88,-10.01 62.04,-11.17 U57.4@63.603,-11.17
Enable_YMF_Bus: R147.1 U5.5 U10.3 U31.1 U34.1 U34.4 U34.10 U34.13 | length 194.8
  F.Cu w0.08: v3(-48.21,-32.79) -48.21,-31.95 -47.28,-31.02 -42.33,-31.02 -40.65,-32.7 -31.68,-32.7 -30.95,-33.43 v3(-29.27,-33.43) ; v3(-29.65,-29.63) -29.15,-29.63 -28.8,-29.28 -27.6,-29.28 -26.83,-30.05 -26.41,-30.05 -25.57,-29.21 U34.13@-25.57,-28.085 ; U34.10@-27.52,-28.085 -27.52,-27.16 -27.12,-26.76 -25.49,-26.76 v3(-25.28,-26.97) ; U34.4@-26.87,-22.36 -26.87,-23.31 -26.75,-23.43 -25.05,-23.43 -24.92,-23.3 v3(-24.92,-22.36) ; v3(-23.95,-23.49) -23.25,-23.49 -23.07,-23.31 -20.41,-23.31 -20.12,-23.02 -20.12,-20.42 -20.21,-20.33 v3(-20.21,-19.84) ; v3(-18.91,-16.14) -16.74,-16.14 v3(-16.73,-16.15) ; v3(-14.37,4.46) -13.83,4.46 -13.72,4.57 -5.58,4.57 -5.09,4.08 -3.34,4.08 v3(-3.11,4.31) ; v3(5.76,21.85) 6.42,21.85 6.98,22.41 10.45,22.41 10.9,22.86 U10.3@10.9,25.47
  F.Cu w0.3: U34.13@-25.57,-28.085 -25.57,-27.26 v3(-25.28,-26.97)
  In1.Cu w0.08: v3(-53.532,26.12) -53.04,25.628 -53.04,19.66 -52.35,18.97 -52.35,11.49 -53.68,10.16 -53.68,3.13 -53.52,2.97 -53.52,0.34 -53.8,0.06 -53.8,-0.75 -53.57,-0.98 -53.57,-10.72 -52.89,-11.4 -52.89,-24.64 v2(-52.32,-25.21) -52.85,-25.74 -52.85,-28.67 -48.73,-32.79 v3(-48.21,-32.79) -48.21,-34.29 -48.15,-34.35 -48.15,-36.033 v3(-48.122,-36.06) ; v3(-29.65,-29.63) -29.65,-29.96 -29.82,-30.13 -29.82,-31.27 -29.27,-31.82 v3(-29.27,-33.43) ; v3(-25.28,-26.97) -25.28,-26.46 -23.95,-25.13 v3(-23.95,-23.49) -24.92,-22.52 v3(-24.92,-22.36) ; v3(-20.21,-19.84) -20.18,-19.81 -20.18,-16.89 -19.43,-16.14 v3(-18.91,-16.14) ; v3(-16.73,-16.15) -16.73,-14.73 -16.42,-14.42 -16.42,-8.84 -15.74,-8.16 -15.74,3.83 -15.27,4.3 -14.53,4.3 v3(-14.37,4.46) ; v3(-3.11,4.31) -2.8,4.62 -2.8,8.28 -2.94,8.42 -2.94,11.34 -3.21,11.61 -3.21,13.36 -3.07,13.5 -1.13,13.5 -0.09,14.54 6.34,14.54 6.52,14.72 6.52,17.44 6.02,17.94 6.02,20.24 5.75,20.51 5.75,21.84 v3(5.76,21.85)
ESS_AEN: U4.40 U72.16 | length 126.7
  F.Cu w0.08: v2(-0.02,38.77) 1.34,38.77 2.77,37.34 U4.40@5.5,37.34
  In4.Cu w0.08: v2(-0.02,38.77) -0.02,37.67 0.99,36.66 3.44,36.66 10.42,29.68 10.42,27.09 10.9,26.61 10.9,20.9 10.22,20.22 10.22,14.62 13.29,11.55 20.31,11.55 21.52,10.34 21.52,7.96 21.21,7.65 21.21,4.69 21.54,4.36 21.54,-1.31 23.24,-3.01 45.04,-3.01 45.31,-3.28 45.31,-4.96 44,-6.27 44,-8.78 45.7,-10.48 45.7,-12.47 53.03,-19.8 53.03,-30.12 52.52,-30.63 51.17,-30.63 50.33,-31.47 50.33,-32.14 v4(51.37,-33.18)
  B.Cu w0.08: U72.16@47.73,-32.025 49.725,-32.025 50.88,-33.18 v4(51.37,-33.18)
ESS_CLK: R70.1 R344.2 | length 50.5
  F.Cu w0.08: v2(-1.91,31.88) -1.75,31.88 -1.04,32.59 R70.1@-1.04,32.89
  In3.Cu w0.08: v2(-28.15,16.88) -27.11,16.88 -26.855,17.135 -25.98,17.135 -25.435,16.59 -22.25,16.59 -22.09,16.75 -22.09,19.06 -22.42,19.39 -22.42,22.07 -22.09,22.4 -20.71,22.4 -20.42,22.11 -20.42,21.79 -20.03,21.4 -19.74,21.4 v2(-19.67,21.33) ; v2(-15.9,20.66) -15.9,21.25 -16.03,21.38 -16.03,23.22 -15.33,23.92 -8.33,23.92 -7.87,24.38 -7.87,27.88 -3.87,31.88 v2(-1.91,31.88)
  In5.Cu w0.08: v2(-19.67,21.33) -19.12,21.88 -18,21.88 -16.78,20.66 v2(-15.9,20.66)
  In8.Cu w0.08: v1(-29,10.51) -29,11.07 -28.66,11.41 -28.66,15.42 -28.15,15.93 v2(-28.15,16.88)
ESS_DACK1#: U4.36 U72.15 | length 123.7
  F.Cu w0.08: v2(0.9,37.76) 1.25,37.41 U4.36@1.25,35.09
  In4.Cu w0.08: v2(0.9,37.76) 1.63,37.03 3.79,37.03 12.4,28.42 12.4,24.87 12.13,24.6 12.13,23.24 12.51,22.86 12.51,21.71 12.42,21.62 12.42,20.29 10.8,18.67 10.8,14.92 13.6,12.12 20.65,12.12 22.2,10.57 22.2,8.17 25.98,4.39 34.06,4.39 35.59,5.92 37.75,5.92 39.38,7.55 40.5,7.55 41.4,8.45 43.97,8.45 44.66,7.76 46.76,7.76 47.52,7 47.52,5.21 45.75,3.44 v4(43.69,3.44)
  In6.Cu w0.08: v4(43.69,3.44) 42.04,1.79 42.04,-0.2 41.26,-0.98 41.26,-5.67 43.71,-8.12 43.71,-12.17 45.89,-14.35 45.89,-24.78 v5(46.47,-25.36)
  In8.Cu w0.08: v5(46.47,-25.36) 46.47,-26.7 47.09,-27.32 47.09,-32.115 47.686,-32.711 v1(47.686,-32.714)
  B.Cu w0.08: v1(47.686,-32.714) 47.691,-32.714 U72.15@47.73,-32.675
ESS_DRDY: U4.21 U66.6 | length 127.8
  F.Cu w0.3: U4.21@-6.95,40.69 -5.61,40.69 v2(-5.36,40.44)
  In4.Cu w0.08: v2(-5.36,40.44) -5.34,40.46 -3.27,40.46 -2.99,40.74 -0.17,40.74 0.51,40.06 0.51,37.44 1.11,36.84 3.62,36.84 11.22,29.24 11.22,22.14 12.22,21.14 12.22,20.48 10.59,18.85 10.59,14.81 13.51,11.89 20.6,11.89 21.89,10.6 21.89,8.09 22.48,7.5 22.48,4.06 21.91,3.49 21.91,-0.98 23.53,-2.6 52.32,-2.6 53.49,-3.77 55.43,-3.77 56.64,-4.98 60.4,-4.98 61.44,-3.94 63.89,-3.94 63.89,-3.95 65.22,-5.28 65.22,-7.93 66.72,-9.43 66.72,-10 67.73,-11.01 68.73,-11.01 69.6,-11.88 69.6,-14.88 v4(69.1,-15.38)
  B.Cu w0.08: v4(69.1,-15.38) 69.64,-15.38 69.985,-15.725 72.658,-15.725 U66.6@72.733,-15.65